# Altium PCB pcb.pcbdoc (part 5 of 6)
Units mm, origin at the board's own origin, x right, y up, seen from the top; angles counter-clockwise.
Board outline 95 x 60 mm, 4 copper layers (Top Layer, TopInt Layer, BotInt Layer, Bottom Layer), stack 1.459 mm thick; 162 components, 164 nets, 673 pads, 269 vias.
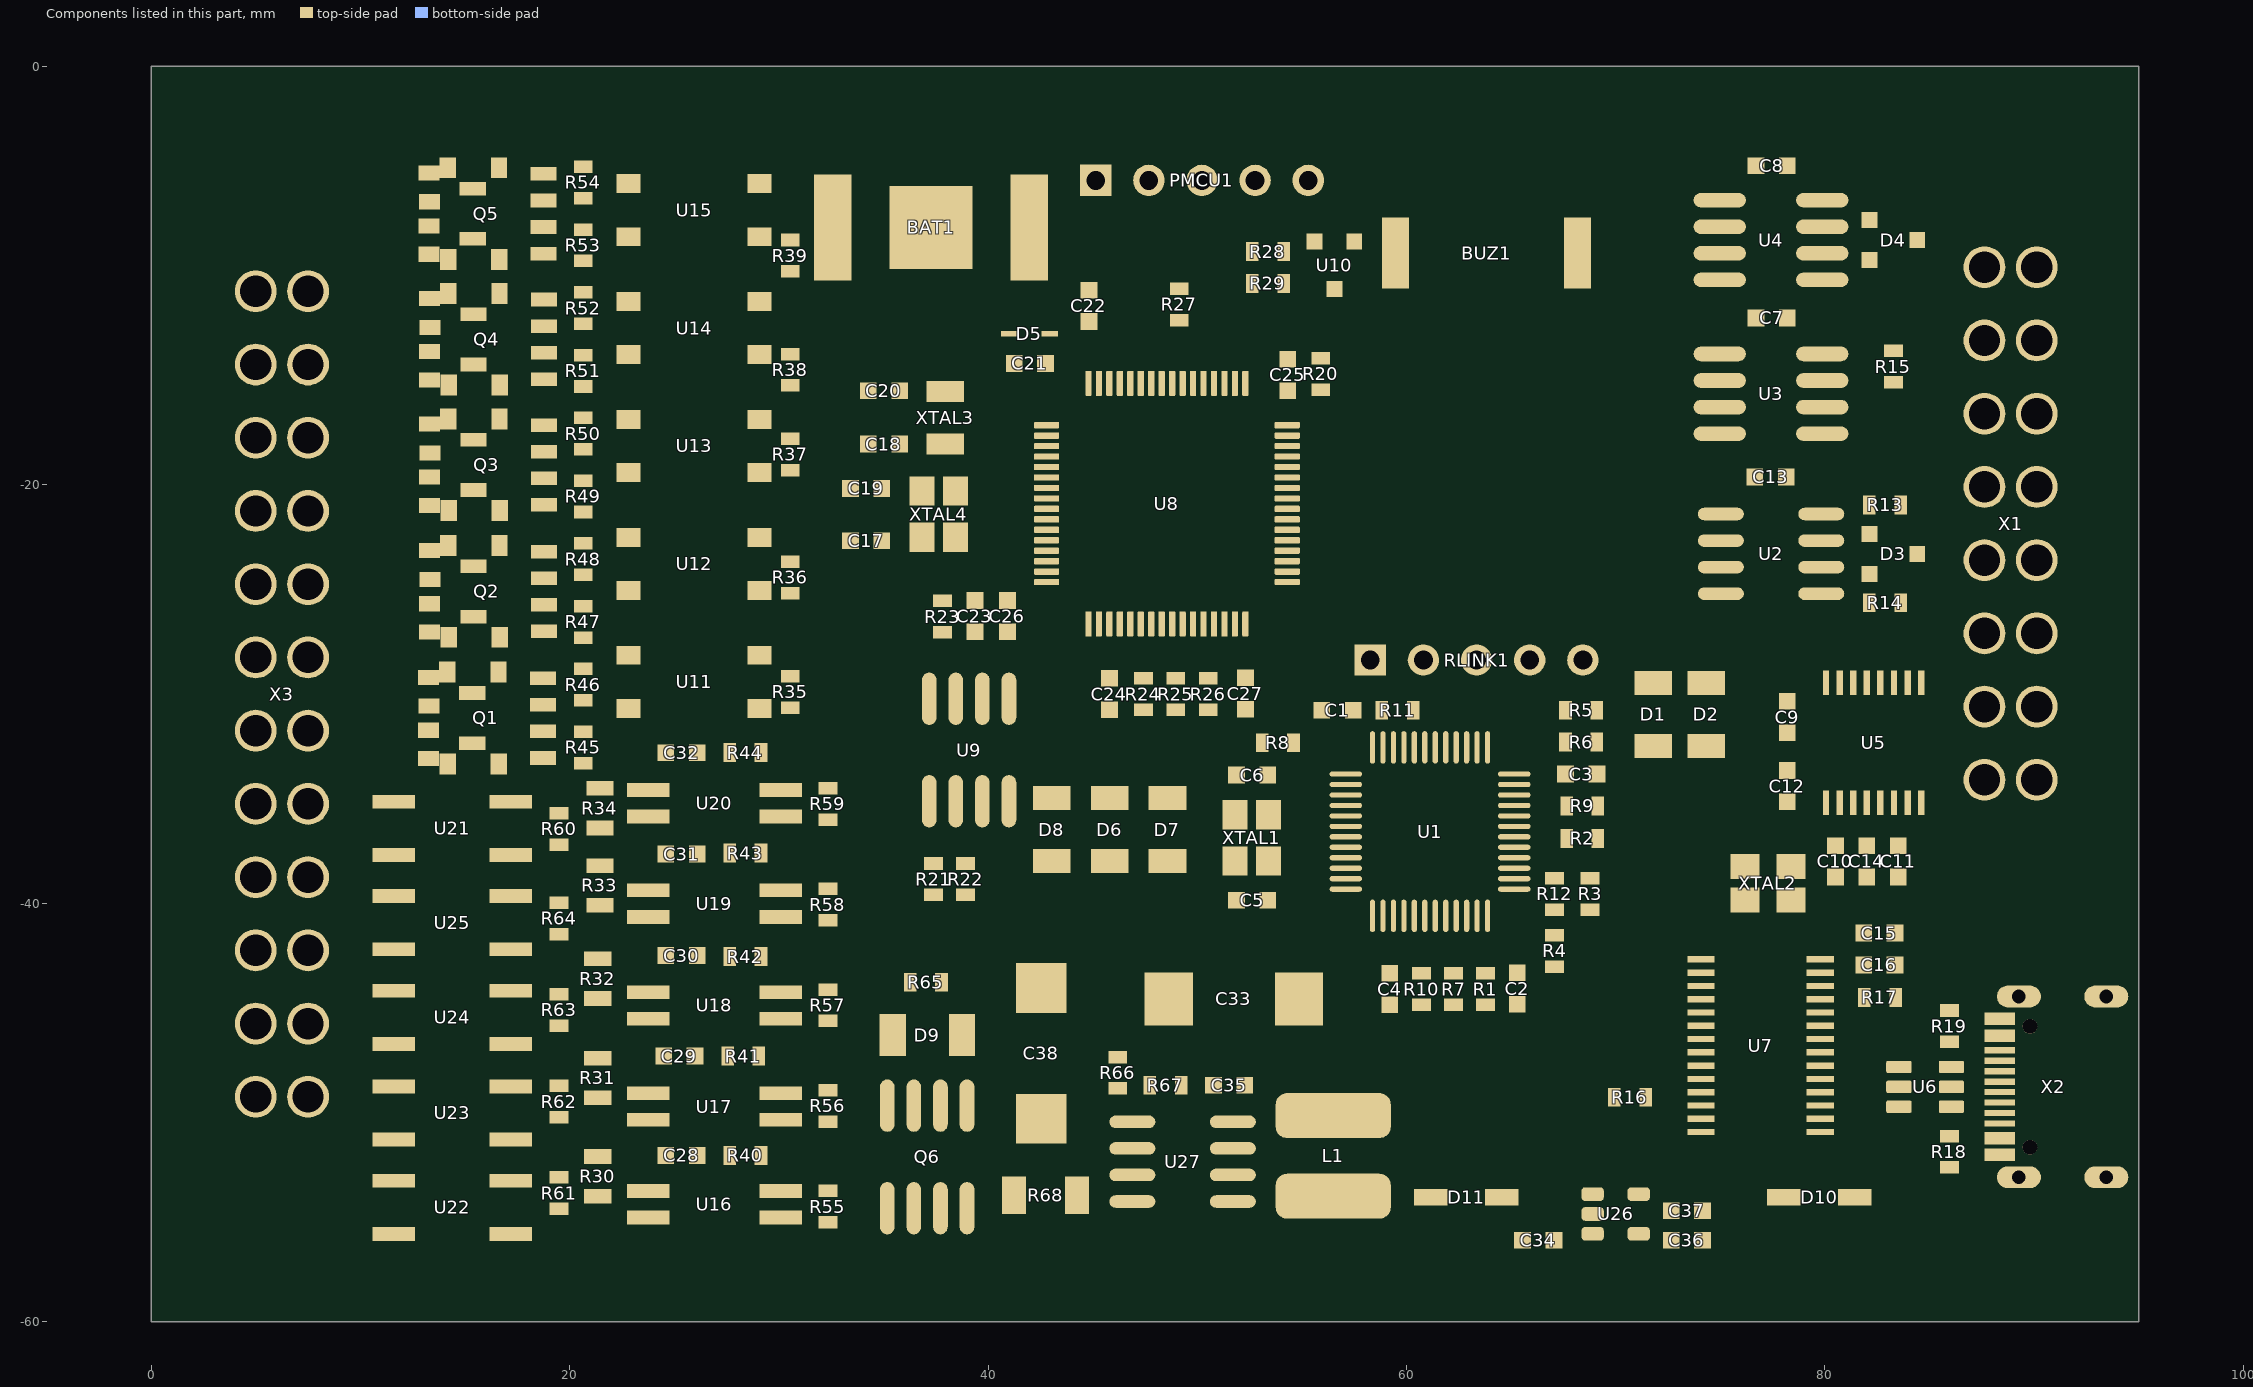
[diagram p7: the components of this part, seen from the top]

## Via types
v1: diameter 0.7, hole 0.3, Top Layer to Bottom Layer, tented both sides, 249 vias
v2: diameter 1, hole 0.5, Top Layer to Bottom Layer, tented both sides, 20 vias

## Nets (pads, with @x,y where several pads share a name; then routed paths per layer and width w, separated by ;. In a path a pad name is that pad's centre, name@x,y a point inside that pad or via, vN(x,y) a via of type N, cw(c..) or ccw(c..) an arc to the next point about the centre after c; other vN are vias at no path point) (continued)
copper on no net: (continued)
  Bottom Layer w0.025: 58.91,-6.877 59.976,-6.877 ; 58.91,-6.851 59.976,-6.851 ; 58.91,-6.826 59.976,-6.826 ; 58.91,-6.8 59.976,-6.8 ; 58.91,-6.775 59.976,-6.775 ; 58.91,-6.75 59.976,-6.75 ; 58.91,-6.724 59.062,-6.724 ; 58.91,-6.699 59.087,-6.699 ; 58.91,-6.673 59.087,-6.673 ; 58.91,-6.648 59.087,-6.648 ; 58.91,-6.623 59.087,-6.623 ; 58.935,-7.308 59.138,-7.308 ; 58.935,-7.283 59.113,-7.283 ; 58.935,-6.597 59.087,-6.597 ; 58.935,-6.572 59.113,-6.572 ; 58.935,-6.546 59.113,-6.546 ; 58.935,-6.521 59.113,-6.521 ; 58.96,-7.334 59.189,-7.334 ; 58.96,-7.258 59.087,-7.258 ; 58.96,-6.496 59.138,-6.496 ; 58.96,-6.47 59.164,-6.47 ; 58.96,-6.445 59.164,-6.445 ; 58.986,-7.359 59.24,-7.359 ; 58.986,-7.232 59.062,-7.232 ; 58.986,-6.419 59.189,-6.419 ; 59.011,-7.385 59.367,-7.385 ; 59.011,-6.394 59.214,-6.394 ; 59.011,-6.369 59.265,-6.369 ; 59.037,-7.41 59.773,-7.41 ; 59.037,-6.343 59.316,-6.343 ; 59.062,-7.435 59.722,-7.435 ; 59.062,-6.318 59.773,-6.318 ; 59.087,-7.461 59.697,-7.461 ; 59.087,-6.292 59.748,-6.292 ; 59.113,-6.267 59.722,-6.267 ; 59.138,-7.486 59.646,-7.486 ; 59.164,-6.242 59.672,-6.242 ; 59.189,-9.29 59.367,-9.29 ; 59.189,-9.264 59.367,-9.264 ; 59.189,-9.239 59.367,-9.239 ; 59.189,-9.213 59.367,-9.213 ; 59.189,-9.188 59.367,-9.188 ; 59.189,-9.163 59.367,-9.163 ; 59.189,-9.137 59.367,-9.137 ; 59.189,-9.112 59.392,-9.112 ; 59.189,-8.629 59.367,-8.629 ; 59.189,-8.604 59.367,-8.604 ; 59.189,-8.578 59.367,-8.578 ; 59.189,-8.553 59.367,-8.553 ; 59.214,-9.366 59.443,-9.366 ; 59.214,-9.34 59.418,-9.34 ; 59.214,-9.315 59.392,-9.315 ; 59.214,-9.086 59.418,-9.086 ; 59.214,-9.061 59.443,-9.061 ; 59.214,-8.528 59.392,-8.528 ; 59.214,-8.502 59.392,-8.502 ; 59.214,-8.477 59.418,-8.477 ; 59.214,-7.512 59.57,-7.512 ; 59.214,-6.216 59.621,-6.216 ; 59.24,-9.391 59.494,-9.391 ; 59.24,-9.036 59.468,-9.036 ; 59.24,-9.01 59.519,-9.01 ; 59.24,-8.451 59.443,-8.451 ; 59.24,-8.426 59.494,-8.426 ; 59.265,-9.417 59.57,-9.417 ; 59.265,-8.985 59.595,-8.985 ; 59.265,-8.401 59.519,-8.401 ; 59.291,-9.442 60.078,-9.442 ; 59.291,-8.959 59.697,-8.959 ; 59.291,-8.375 59.621,-8.375 ; 59.291,-8.35 60.053,-8.35 ; 59.291,-6.191 59.545,-6.191 ; 59.316,-9.467 60.053,-9.467 ; 59.316,-8.934 59.799,-8.934 ; 59.341,-9.493 60.002,-9.493 ; 59.341,-8.324 60.027,-8.324 ; 59.367,-8.909 59.875,-8.909 ; 59.367,-8.299 59.976,-8.299 ; 59.392,-9.518 59.976,-9.518 ; 59.418,-8.883 59.951,-8.883 ; 59.418,-8.274 59.951,-8.274 ; 59.418,-7.385 59.799,-7.385 ; 59.443,-9.544 59.9,-9.544 ; 59.494,-8.858 60.002,-8.858 ; 59.494,-8.248 59.875,-8.248 ; 59.519,-6.343 59.799,-6.343 ; 59.545,-7.359 59.824,-7.359 ; 59.57,-9.569 59.799,-9.569 ; 59.57,-8.832 60.027,-8.832 ; 59.595,-7.334 59.849,-7.334 ; 59.595,-6.369 59.824,-6.369 ; 59.621,-7.308 59.849,-7.308 ; 59.621,-6.394 59.849,-6.394 ; 59.646,-7.283 59.875,-7.283 ; 59.646,-6.419 59.875,-6.419 ; 59.672,-8.807 60.053,-8.807 ; 59.672,-7.258 59.9,-7.258 ; 59.672,-6.445 59.875,-6.445 ; 59.697,-7.232 59.9,-7.232 ; 59.697,-6.47 59.9,-6.47 ; 59.722,-7.207 59.926,-7.207 ; 59.722,-6.496 59.9,-6.496 ; 59.748,-8.375 60.078,-8.375 ; 59.748,-7.181 59.926,-7.181 ; 59.748,-7.156 59.951,-7.156 ; 59.748,-6.546 59.926,-6.546 ; 59.748,-6.521 59.926,-6.521 ; 59.773,-8.782 60.078,-8.782 ; 59.773,-7.131 59.951,-7.131 ; 59.773,-7.105 59.951,-7.105 ; 59.773,-6.623 59.951,-6.623 ; 59.773,-6.597 59.951,-6.597 ; 59.773,-6.572 59.951,-6.572 ; 59.799,-9.417 60.103,-9.417 ; 59.799,-7.08 59.976,-7.08 ; 59.799,-7.054 59.976,-7.054 ; 59.799,-7.029 59.976,-7.029 ; 59.799,-7.004 59.976,-7.004 ; 59.799,-6.724 59.976,-6.724 ; 59.799,-6.699 59.976,-6.699 ; 59.799,-6.673 59.976,-6.673 ; 59.799,-6.648 59.976,-6.648 ; 59.824,-8.756 60.103,-8.756 ; 59.824,-6.978 59.976,-6.978 ; 59.824,-6.953 59.976,-6.953 ; 59.824,-6.927 59.976,-6.927 ; 59.824,-6.902 59.976,-6.902 ; 59.849,-8.401 60.103,-8.401 ; 59.875,-9.391 60.129,-9.391 ; 59.875,-8.731 60.129,-8.731 ; 59.875,-8.426 60.103,-8.426 ; 59.9,-9.366 60.129,-9.366 ; 59.926,-8.705 60.129,-8.705 ; 59.926,-8.451 60.129,-8.451 ; 59.951,-9.34 60.154,-9.34 ; 59.951,-8.68 60.129,-8.68 ; 59.951,-8.655 60.129,-8.655 ; 59.951,-8.502 60.129,-8.502 ; 59.951,-8.477 60.129,-8.477 ; 59.976,-9.315 60.154,-9.315 ; 59.976,-9.29 60.18,-9.29 ; 59.976,-8.629 60.154,-8.629 ; 59.976,-8.604 60.154,-8.604 ; 59.976,-8.578 60.154,-8.578 ; 59.976,-8.553 60.154,-8.553 ; 59.976,-8.528 60.154,-8.528 ; 60.002,-9.264 60.18,-9.264 ; 60.002,-9.239 60.18,-9.239 ; 60.002,-9.213 60.18,-9.213 ; 60.027,-9.188 60.18,-9.188 ; 60.078,-6.343 60.154,-6.343 ; 60.078,-6.318 60.51,-6.318 ; 60.078,-6.292 60.484,-6.292 ; 60.078,-6.267 60.459,-6.267 ; 60.078,-6.242 60.408,-6.242 ; 60.078,-6.216 60.383,-6.216 ; 60.078,-6.191 60.307,-6.191 ; 60.23,-6.343 60.51,-6.343 ; 60.23,-4.972 60.408,-4.972 ; 60.23,-4.946 60.408,-4.946 ; 60.23,-4.921 60.408,-4.921 ; 60.23,-4.895 60.408,-4.895 ; 60.23,-4.87 60.408,-4.87 ; 60.23,-4.845 60.434,-4.845 ; 60.256,-5.048 60.459,-5.048 ; 60.256,-5.022 60.434,-5.022 ; 60.256,-4.997 60.434,-4.997 ; 60.256,-4.819 60.434,-4.819 ; 60.256,-4.794 60.459,-4.794 ; 60.256,-4.768 60.484,-4.768 ; 60.256,-4.311 60.408,-4.311 ; 60.256,-4.286 60.408,-4.286 ; 60.256,-4.26 60.434,-4.26 ; 60.256,-4.235 60.434,-4.235 ; 60.256,-4.21 60.459,-4.21 ; 60.256,-4.184 60.459,-4.184 ; 60.281,-5.099 60.535,-5.099 ; 60.281,-5.073 60.51,-5.073 ; 60.281,-4.743 60.51,-4.743 ; 60.281,-4.718 60.561,-4.718 ; 60.281,-4.159 60.484,-4.159 ; 60.281,-4.133 60.535,-4.133 ; 60.307,-5.124 60.611,-5.124 ; 60.307,-4.692 60.637,-4.692 ; 60.307,-4.108 60.586,-4.108 ; 60.332,-6.369 60.688,-6.369 ; 60.332,-5.149 61.119,-5.149 ; 60.332,-4.667 60.713,-4.667 ; 60.332,-4.083 60.662,-4.083 ; 60.357,-5.175 61.094,-5.175 ; 60.357,-4.057 61.094,-4.057 ; 60.383,-6.394 60.688,-6.394 ; 60.383,-5.2 61.069,-5.2 ; 60.383,-4.641 60.84,-4.641 ; 60.383,-4.032 61.069,-4.032 ; 60.408,-6.419 60.688,-6.419 ; 60.408,-4.616 60.916,-4.616 ; 60.408,-4.006 61.043,-4.006 ; 60.434,-6.445 60.688,-6.445 ; 60.434,-5.226 61.018,-5.226 ; 60.459,-9.544 60.637,-9.544 ; 60.459,-9.518 60.637,-9.518 ; 60.459,-9.493 60.637,-9.493 ; 60.459,-9.467 60.637,-9.467 ; 60.459,-9.442 60.637,-9.442 ; 60.459,-9.417 60.637,-9.417 ; 60.459,-9.391 60.637,-9.391 ; 60.459,-9.366 60.637,-9.366 ; 60.459,-9.34 60.637,-9.34 ; 60.459,-9.315 60.637,-9.315 ; 60.459,-9.29 60.637,-9.29 ; 60.459,-9.264 60.637,-9.264 ; 60.459,-9.239 60.637,-9.239 ; 60.459,-9.213 60.637,-9.213 ; 60.459,-9.188 60.637,-9.188 ; 60.459,-9.163 60.637,-9.163 ; 60.459,-9.137 60.637,-9.137 ; 60.459,-9.112 60.637,-9.112 ; 60.459,-9.086 60.637,-9.086 ; 60.459,-9.061 60.637,-9.061 ; 60.459,-9.036 60.637,-9.036 ; 60.459,-9.01 60.637,-9.01 ; 60.459,-8.985 60.637,-8.985 ; 60.459,-8.959 60.637,-8.959 ; 60.459,-8.934 60.637,-8.934 ; 60.459,-8.909 60.637,-8.909 ; 60.459,-8.883 60.637,-8.883 ; 60.459,-8.858 60.637,-8.858 ; 60.459,-8.832 60.637,-8.832 ; 60.459,-8.807 60.637,-8.807 ; 60.459,-8.782 60.637,-8.782 ; 60.459,-8.756 60.637,-8.756 ; 60.459,-8.731 60.637,-8.731 ; 60.459,-8.705 60.637,-8.705 ; 60.459,-8.68 60.637,-8.68 ; 60.459,-8.655 60.637,-8.655 ; 60.459,-8.629 60.637,-8.629 ; 60.459,-8.604 60.637,-8.604 ; 60.459,-8.578 60.637,-8.578 ; 60.459,-6.47 60.688,-6.47 ; 60.459,-4.591 60.992,-4.591 ; 60.459,-3.981 60.992,-3.981 ; 60.484,-8.553 60.662,-8.553 ; 60.484,-8.528 60.662,-8.528 ; 60.484,-8.502 60.662,-8.502 ; 60.484,-8.477 60.688,-8.477 ; 60.484,-6.521 60.688,-6.521 ; 60.484,-6.496 60.688,-6.496 ; 60.51,-8.451 60.713,-8.451 ; 60.51,-8.426 60.738,-8.426 ; 60.51,-8.401 60.764,-8.401 ; 60.51,-6.597 60.688,-6.597 ; 60.51,-6.572 60.688,-6.572 ; 60.51,-6.546 60.688,-6.546 ; 60.51,-5.251 60.942,-5.251 ; 60.535,-8.375 60.865,-8.375 ; 60.535,-7.486 60.688,-7.486 ; 60.535,-7.461 60.688,-7.461 ; 60.535,-7.435 60.688,-7.435 ; 60.535,-7.41 60.688,-7.41 ; 60.535,-7.385 60.688,-7.385 ; 60.535,-7.359 60.688,-7.359 ; 60.535,-7.334 60.688,-7.334 ; 60.535,-7.308 60.688,-7.308 ; 60.535,-7.283 60.688,-7.283 ; 60.535,-7.258 60.688,-7.258 ; 60.535,-7.232 60.688,-7.232 ; 60.535,-7.207 60.688,-7.207 ; 60.535,-7.181 60.688,-7.181 ; 60.535,-7.156 60.688,-7.156 ; 60.535,-7.131 60.688,-7.131 ; 60.535,-7.105 60.688,-7.105 ; 60.535,-7.08 60.688,-7.08 ; 60.535,-7.054 60.688,-7.054 ; 60.535,-7.029 60.688,-7.029 ; 60.535,-7.004 60.688,-7.004 ; 60.535,-6.978 60.688,-6.978 ; 60.535,-6.953 60.688,-6.953 ; 60.535,-6.927 60.688,-6.927 ; 60.535,-6.902 60.688,-6.902 ; 60.535,-6.877 60.688,-6.877 ; 60.535,-6.851 60.688,-6.851 ; 60.535,-6.826 60.688,-6.826 ; 60.535,-6.8 60.688,-6.8 ; 60.535,-6.775 60.688,-6.775 ; 60.535,-6.75 60.688,-6.75 ; 60.535,-6.724 60.688,-6.724 ; 60.535,-6.699 60.688,-6.699 ; 60.535,-6.673 60.688,-6.673 ; 60.535,-6.648 60.688,-6.648 ; 60.535,-6.623 60.688,-6.623 ; 60.535,-6.343 60.688,-6.343 ; 60.535,-6.318 60.688,-6.318 ; 60.535,-6.292 60.688,-6.292 ; 60.535,-6.267 60.688,-6.267 ; 60.535,-6.242 60.688,-6.242 ; 60.535,-6.216 60.688,-6.216 ; 60.535,-4.565 61.043,-4.565 ; 60.535,-3.956 60.942,-3.956 ; 60.561,-8.35 61.221,-8.35 ; 60.586,-8.324 61.196,-8.324 ; 60.611,-8.299 61.145,-8.299 ; 60.611,-4.54 61.069,-4.54 ; 60.637,-8.274 61.119,-8.274 ; 60.637,-5.276 60.815,-5.276 ; 60.662,-3.93 60.789,-3.93 ; 60.713,-8.248 61.043,-8.248 ; 60.713,-4.514 61.094,-4.514 ; 60.815,-5.124 61.145,-5.124 ; 60.815,-4.489 61.119,-4.489 ; 60.815,-4.083 61.119,-4.083 ; 60.865,-4.464 61.145,-4.464 ; 60.891,-4.108 61.145,-4.108 ; 60.916,-5.099 61.17,-5.099 ; 60.942,-5.073 61.196,-5.073 ; 60.942,-4.438 61.17,-4.438 ; 60.942,-4.133 61.17,-4.133 ; 60.967,-8.375 61.246,-8.375 ; 60.967,-4.413 61.17,-4.413 ; 60.967,-4.159 61.17,-4.159 ; 60.992,-5.048 61.196,-5.048 ; 60.992,-4.387 61.196,-4.387 ; 60.992,-4.184 61.17,-4.184 ; 61.018,-7.486 61.196,-7.486 ; 61.018,-7.461 61.196,-7.461 ; 61.018,-7.435 61.196,-7.435 ; 61.018,-7.41 61.196,-7.41 ; 61.018,-5.022 61.221,-5.022 ; 61.018,-4.997 61.221,-4.997 ; 61.018,-4.362 61.196,-4.362 ; 61.018,-4.337 61.196,-4.337 ; 61.018,-4.311 61.196,-4.311 ; 61.018,-4.286 61.196,-4.286 ; 61.018,-4.26 61.196,-4.26 ; 61.018,-4.235 61.196,-4.235 ; 61.018,-4.21 61.196,-4.21 ; 61.043,-8.401 61.272,-8.401 ; 61.043,-7.385 61.221,-7.385 ; 61.043,-7.359 61.475,-7.359 ; 61.043,-7.334 61.424,-7.334 ; 61.043,-7.308 61.373,-7.308 ; 61.043,-7.283 61.348,-7.283 ; 61.043,-7.258 61.297,-7.258 ; 61.043,-7.232 61.272,-7.232 ; 61.043,-7.207 61.272,-7.207 ; 61.043,-7.181 61.246,-7.181 ; 61.043,-7.156 61.221,-7.156 ; 61.043,-7.131 61.221,-7.131 ; 61.043,-7.105 61.221,-7.105 ; 61.043,-7.08 61.221,-7.08 ; 61.043,-7.054 61.221,-7.054 ; 61.043,-7.029 61.221,-7.029 ; 61.043,-7.004 61.221,-7.004 ; 61.043,-6.978 61.221,-6.978 ; 61.043,-6.953 61.221,-6.953 ; 61.043,-6.927 61.221,-6.927 ; 61.043,-6.902 61.221,-6.902 ; 61.043,-6.877 61.221,-6.877 ; 61.043,-6.851 61.907,-6.851 ; 61.043,-6.826 61.881,-6.826 ; 61.043,-6.8 61.831,-6.8 ; 61.043,-6.775 61.754,-6.775 ; 61.043,-6.75 61.627,-6.75 ; 61.043,-6.724 61.221,-6.724 ; 61.043,-6.699 61.221,-6.699 ; 61.043,-6.673 61.221,-6.673 ; 61.043,-6.648 61.221,-6.648 ; 61.043,-6.623 61.221,-6.623 ; 61.043,-6.597 61.221,-6.597 ; 61.043,-6.572 61.221,-6.572 ; 61.043,-6.546 61.221,-6.546 ; 61.043,-6.521 61.221,-6.521 ; 61.043,-4.972 61.221,-4.972 ; 61.043,-4.946 61.221,-4.946 ; 61.069,-6.496 61.246,-6.496 ; 61.069,-6.47 61.246,-6.47 ; 61.069,-6.445 61.272,-6.445 ; 61.069,-4.921 61.246,-4.921 ; 61.069,-4.895 61.246,-4.895 ; 61.094,-8.426 61.45,-8.426 ; 61.094,-6.419 61.272,-6.419 ; 61.094,-6.394 61.323,-6.394 ; 61.119,-6.369 61.348,-6.369 ; 61.119,-6.343 61.399,-6.343 ; 61.145,-8.451 61.45,-8.451 ; 61.145,-6.318 61.907,-6.318 ; 61.17,-8.477 61.45,-8.477 ; 61.17,-6.292 61.881,-6.292 ; 61.196,-8.528 61.45,-8.528 ; 61.196,-8.502 61.45,-8.502 ; 61.196,-6.267 61.856,-6.267 ; 61.221,-8.553 61.45,-8.553 ; 61.246,-8.604 61.45,-8.604 ; 61.246,-8.578 61.45,-8.578 ; 61.246,-7.385 61.983,-7.385 ; 61.246,-6.242 61.805,-6.242 ; 61.272,-8.655 61.45,-8.655 ; 61.272,-8.629 61.45,-8.629 ; 61.272,-7.41 61.958,-7.41 ; 61.297,-9.544 61.45,-9.544 ; 61.297,-9.518 61.45,-9.518 ; 61.297,-9.493 61.45,-9.493 ; 61.297,-9.467 61.45,-9.467 ; 61.297,-9.442 61.45,-9.442 ; 61.297,-9.417 61.45,-9.417 ; 61.297,-9.391 61.45,-9.391 ; 61.297,-9.366 61.45,-9.366 ; 61.297,-9.34 61.45,-9.34 ; 61.297,-9.315 61.45,-9.315 ; 61.297,-9.29 61.45,-9.29 ; 61.297,-9.264 61.45,-9.264 ; 61.297,-9.239 61.45,-9.239 ; 61.297,-9.213 61.45,-9.213 ; 61.297,-9.188 61.45,-9.188 ; 61.297,-9.163 61.45,-9.163 ; 61.297,-9.137 61.45,-9.137 ; 61.297,-9.112 61.45,-9.112 ; 61.297,-9.086 61.45,-9.086 ; 61.297,-9.061 61.45,-9.061 ; 61.297,-9.036 61.45,-9.036 ; 61.297,-9.01 61.45,-9.01 ; 61.297,-8.985 61.45,-8.985 ; 61.297,-8.959 61.45,-8.959 ; 61.297,-8.934 61.45,-8.934 ; 61.297,-8.909 61.45,-8.909 ; 61.297,-8.883 61.45,-8.883 ; 61.297,-8.858 61.45,-8.858 ; 61.297,-8.832 61.45,-8.832 ; 61.297,-8.807 61.45,-8.807 ; 61.297,-8.782 61.45,-8.782 ; 61.297,-8.756 61.45,-8.756 ; 61.297,-8.731 61.45,-8.731 ; 61.297,-8.705 61.45,-8.705 ; 61.297,-8.68 61.45,-8.68 ; 61.297,-8.401 61.45,-8.401 ; 61.297,-8.375 61.45,-8.375 ; 61.297,-8.35 61.45,-8.35 ; 61.297,-8.324 61.45,-8.324 ; 61.297,-8.299 61.45,-8.299 ; 61.297,-8.274 61.45,-8.274 ; 61.297,-8.248 61.45,-8.248 ; 61.297,-7.435 61.932,-7.435 ; 61.297,-6.216 61.754,-6.216 ; 61.348,-7.461 61.907,-7.461 ; 61.399,-7.486 61.856,-7.486 ; 61.399,-6.191 61.653,-6.191 ; 61.424,-4.921 61.602,-4.921 ; 61.424,-4.895 61.602,-4.895 ; 61.424,-4.87 61.602,-4.87 ; 61.424,-4.845 61.602,-4.845 ; 61.424,-4.387 61.602,-4.387 ; 61.424,-4.362 61.602,-4.362 ; 61.424,-4.337 61.602,-4.337 ; 61.424,-4.311 61.602,-4.311 ; 61.45,-4.997 61.653,-4.997 ; 61.45,-4.972 61.627,-4.972 ; 61.45,-4.946 61.627,-4.946 ; 61.45,-4.286 61.627,-4.286 ; 61.45,-4.26 61.627,-4.26 ; 61.45,-4.235 61.653,-4.235 ; 61.475,-7.512 61.805,-7.512 ; 61.475,-5.048 61.704,-5.048 ; 61.475,-5.022 61.678,-5.022 ; 61.475,-4.21 61.653,-4.21 ; 61.475,-4.184 61.678,-4.184 ; 61.5,-5.073 61.729,-5.073 ; 61.5,-4.159 61.704,-4.159 ; 61.5,-4.133 61.729,-4.133 ; 61.526,-6.877 61.932,-6.877 ; 61.526,-5.099 61.78,-5.099 ; 61.526,-4.108 61.78,-4.108 ; 61.551,-5.124 61.831,-5.124 ; 61.551,-4.083 61.856,-4.083 ; 61.577,-5.149 62.313,-5.149 ; 61.577,-4.057 62.288,-4.057 ; 61.602,-5.175 62.262,-5.175 ; 61.602,-4.032 62.262,-4.032 ; 61.627,-5.2 62.237,-5.2 ; 61.627,-4.006 62.237,-4.006 ; 61.653,-6.902 61.958,-6.902 ; 61.653,-6.343 61.932,-6.343 ; 61.678,-5.226 62.186,-5.226 ; 61.678,-3.981 62.186,-3.981 ; 61.729,-9.112 61.907,-9.112 ; 61.729,-9.086 61.907,-9.086 ; 61.729,-9.061 61.907,-9.061 ; 61.729,-9.036 61.907,-9.036 ; 61.729,-9.01 61.881,-9.01 ; 61.729,-8.985 61.881,-8.985 ; 61.729,-8.959 61.881,-8.959 ; 61.729,-8.934 61.881,-8.934 ; 61.729,-8.909 61.881,-8.909 ; 61.729,-8.883 61.881,-8.883 ; 61.729,-8.858 61.881,-8.858 ; 61.729,-8.832 61.881,-8.832 ; 61.729,-8.807 61.881,-8.807 ; 61.729,-8.782 61.881,-8.782 ; 61.729,-8.756 61.907,-8.756 ; 61.729,-8.731 61.907,-8.731 ; 61.729,-8.705 61.907,-8.705 ; 61.729,-8.68 61.907,-8.68 ; 61.729,-7.359 62.008,-7.359 ; 61.729,-6.927 61.983,-6.927 ; 61.729,-6.369 61.958,-6.369 ; 61.729,-3.956 62.135,-3.956 ; 61.754,-9.188 61.932,-9.188 ; 61.754,-9.163 61.932,-9.163 ; 61.754,-9.137 61.932,-9.137 ; 61.754,-8.655 61.932,-8.655 ; 61.754,-8.629 61.932,-8.629 ; 61.754,-8.604 61.958,-8.604 ; 61.754,-6.394 61.983,-6.394 ; 61.754,-5.251 62.135,-5.251 ; 61.78,-9.264 61.983,-9.264 ; 61.78,-9.239 61.983,-9.239 ; 61.78,-9.213 61.958,-9.213 ; 61.78,-8.578 61.958,-8.578 ; 61.78,-8.553 61.983,-8.553 ; 61.78,-7.334 62.034,-7.334 ; 61.78,-6.953 62.008,-6.953 ; 61.78,-6.419 62.008,-6.419 ; 61.805,-9.315 62.034,-9.315 ; 61.805,-9.29 62.008,-9.29 ; 61.805,-8.528 62.008,-8.528 ; 61.805,-8.502 62.008,-8.502 ; 61.805,-7.308 62.034,-7.308 ; 61.805,-6.978 62.034,-6.978 ; 61.805,-6.445 62.008,-6.445 ; 61.831,-9.34 62.059,-9.34 ; 61.831,-8.477 62.034,-8.477 ; 61.831,-8.451 62.059,-8.451 ; 61.831,-7.283 62.034,-7.283 ; 61.831,-7.004 62.034,-7.004 ; 61.831,-6.47 62.008,-6.47 ; 61.856,-9.366 62.085,-9.366 ; 61.856,-8.426 62.11,-8.426 ; 61.856,-7.258 62.059,-7.258 ; 61.856,-7.029 62.034,-7.029 ; 61.856,-6.572 62.034,-6.572 ; 61.856,-6.546 62.034,-6.546 ; 61.856,-6.521 62.034,-6.521 ; 61.856,-6.496 62.034,-6.496 ; 61.856,-5.276 62.008,-5.276 ; 61.881,-9.391 62.135,-9.391 ; 61.881,-8.401 62.161,-8.401 ; 61.881,-7.232 62.059,-7.232 ; 61.881,-7.207 62.059,-7.207 ; 61.881,-7.181 62.059,-7.181 ; 61.881,-7.156 62.059,-7.156 ; 61.881,-7.131 62.059,-7.131 ; 61.881,-7.105 62.059,-7.105 ; 61.881,-7.08 62.059,-7.08 ; 61.881,-7.054 62.059,-7.054 ; 61.881,-3.93 61.983,-3.93 ; 61.907,-9.417 62.212,-9.417 ; 61.907,-8.375 62.237,-8.375 ; 61.932,-9.442 62.669,-9.442 ; 61.932,-8.35 62.669,-8.35 ; 61.958,-9.467 62.643,-9.467 ; 61.958,-8.324 62.643,-8.324 ; 61.983,-9.493 62.618,-9.493 ; 62.008,-8.299 62.593,-8.299 ; 62.008,-4.083 62.313,-4.083 ; 62.034,-9.518 62.567,-9.518 ; 62.034,-5.124 62.339,-5.124 ; 62.059,-8.274 62.542,-8.274 ; 62.085,-9.544 62.516,-9.544 ; 62.085,-5.099 62.339,-5.099 ; 62.085,-4.108 62.339,-4.108 ; 62.11,-8.248 62.491,-8.248 ; 62.135,-5.073 62.364,-5.073 ; 62.135,-4.133 62.364,-4.133 ; 62.161,-5.048 62.389,-5.048 ; 62.161,-4.159 62.389,-4.159 ; 62.186,-5.022 62.389,-5.022 ; 62.186,-4.184 62.389,-4.184 ; 62.212,-9.569 62.415,-9.569 ; 62.212,-4.997 62.415,-4.997 ; 62.212,-4.21 62.415,-4.21 ; 62.237,-6.267 62.415,-6.267 ; 62.237,-6.242 62.415,-6.242 ; 62.237,-6.216 62.415,-6.216 ; 62.237,-4.972 62.415,-4.972 ; 62.237,-4.26 62.44,-4.26 ; 62.237,-4.235 62.415,-4.235 ; 62.262,-6.343 62.44,-6.343 ; 62.262,-6.318 62.44,-6.318 ; 62.262,-6.292 62.44,-6.292 ; 62.262,-4.946 62.44,-4.946 ; 62.262,-4.921 62.44,-4.921 ; 62.262,-4.311 62.466,-4.311 ; 62.262,-4.286 62.44,-4.286 ; 62.288,-6.445 62.466,-6.445 ; 62.288,-6.419 62.466,-6.419 ; 62.288,-6.394 62.466,-6.394 ; 62.288,-6.369 62.466,-6.369 ; 62.288,-4.895 62.466,-4.895 ; 62.288,-4.87 62.466,-4.87 ; 62.288,-4.845 62.466,-4.845 ; 62.288,-4.387 62.466,-4.387 ; 62.288,-4.362 62.466,-4.362 ; 62.288,-4.337 62.466,-4.337 ; 62.313,-6.521 62.491,-6.521 ; 62.313,-6.496 62.491,-6.496 ; 62.313,-6.47 62.491,-6.47 ; 62.313,-4.819 62.466,-4.819 ; 62.313,-4.794 62.491,-4.794 ; 62.313,-4.768 62.491,-4.768 ; 62.313,-4.743 62.491,-4.743 ; 62.313,-4.718 62.491,-4.718 ; 62.313,-4.692 62.491,-4.692 ; 62.313,-4.667 62.491,-4.667 ; 62.313,-4.641 62.491,-4.641 ; 62.313,-4.616 62.491,-4.616 ; 62.313,-4.591 62.491,-4.591 ; 62.313,-4.565 62.491,-4.565 ; 62.313,-4.54 62.491,-4.54 ; 62.313,-4.514 62.491,-4.514 ; 62.313,-4.489 62.491,-4.489 ; 62.313,-4.464 62.491,-4.464 ; 62.313,-4.438 62.491,-4.438 ; 62.313,-4.413 62.491,-4.413 ; 62.339,-6.597 62.516,-6.597 ; 62.339,-6.572 62.516,-6.572 ; 62.339,-6.546 62.491,-6.546 ; 62.364,-8.375 62.694,-8.375 ; 62.364,-6.699 62.542,-6.699 ; 62.364,-6.673 62.542,-6.673 ; 62.364,-6.648 62.516,-6.648 ; 62.364,-6.623 62.516,-6.623 ; 62.389,-9.417 62.72,-9.417 ; 62.389,-6.775 62.567,-6.775 ; 62.389,-6.75 62.567,-6.75 ; 62.389,-6.724 62.542,-6.724 ; 62.415,-6.877 62.593,-6.877 ; 62.415,-6.851 62.593,-6.851 ; 62.415,-6.826 62.567,-6.826 ; 62.415,-6.8 62.567,-6.8 ; 62.44,-8.401 62.72,-8.401 ; 62.44,-6.953 62.618,-6.953 ; 62.44,-6.927 62.593,-6.927 ; 62.44,-6.902 62.593,-6.902 ; 62.466,-9.391 62.72,-9.391 ; 62.466,-7.054 62.643,-7.054 ; 62.466,-7.029 62.618,-7.029 ; 62.466,-7.004 62.618,-7.004 ; 62.466,-6.978 62.618,-6.978 ; 62.491,-8.426 62.745,-8.426 ; 62.491,-7.131 62.669,-7.131 ; 62.491,-7.105 62.643,-7.105 ; 62.491,-7.08 62.643,-7.08 ; 62.516,-9.366 62.745,-9.366 ; 62.516,-7.207 62.669,-7.207 ; 62.516,-7.181 62.669,-7.181 ; 62.516,-7.156 62.669,-7.156 ; 62.542,-9.34 62.77,-9.34 ; 62.542,-8.451 62.77,-8.451 ; 62.542,-7.308 62.821,-7.308 ; 62.542,-7.283 62.821,-7.283 ; 62.542,-7.258 62.847,-7.258 ; 62.542,-7.232 62.847,-7.232 ; 62.567,-9.315 62.796,-9.315 ; 62.567,-8.477 62.77,-8.477 ; 62.567,-7.385 62.796,-7.385 ; 62.567,-7.359 62.796,-7.359 ; 62.567,-7.334 62.821,-7.334 ; 62.593,-9.29 62.796,-9.29 ; 62.593,-8.502 62.796,-8.502 ; 62.593,-7.486 62.77,-7.486 ; 62.593,-7.461 62.77,-7.461 ; 62.593,-7.435 62.77,-7.435 ; 62.593,-7.41 62.796,-7.41 ; 62.618,-9.264 62.821,-9.264 ; 62.618,-8.553 62.821,-8.553 ; 62.618,-8.528 62.821,-8.528 ; 62.643,-9.239 62.821,-9.239 ; 62.643,-9.213 62.847,-9.213 ; 62.643,-8.604 62.847,-8.604 ; 62.643,-8.578 62.821,-8.578 ; 62.669,-9.188 62.847,-9.188 ; 62.669,-9.163 62.847,-9.163 ; 62.669,-9.137 62.872,-9.137 ; 62.669,-8.655 62.847,-8.655 ; 62.669,-8.629 62.847,-8.629 ; 62.694,-9.112 62.872,-9.112 ; 62.694,-9.086 62.872,-9.086 ; 62.694,-9.061 62.872,-9.061 ; 62.694,-8.756 62.872,-8.756 ; 62.694,-8.731 62.872,-8.731 ; 62.694,-8.705 62.872,-8.705 ; 62.694,-8.68 62.872,-8.68 ; 62.694,-7.207 62.847,-7.207 ; 62.694,-7.181 62.872,-7.181 ; 62.72,-9.036 62.872,-9.036 ; 62.72,-9.01 62.872,-9.01 ; 62.72,-8.985 62.872,-8.985 ; 62.72,-8.959 62.897,-8.959 ; 62.72,-8.934 62.897,-8.934 ; 62.72,-8.909 62.897,-8.909 ; 62.72,-8.883 62.897,-8.883 ; 62.72,-8.858 62.897,-8.858 ; 62.72,-8.832 62.897,-8.832 ; 62.72,-8.807 62.872,-8.807 ; 62.72,-8.782 62.872,-8.782 ; 62.72,-7.156 62.872,-7.156 ; 62.72,-7.131 62.872,-7.131 ; 62.72,-7.105 62.897,-7.105 ; 62.745,-7.08 62.897,-7.08 ; 62.745,-7.054 62.897,-7.054 ; 62.745,-7.029 62.923,-7.029 ; 62.745,-3.651 62.948,-3.651 ; 62.745,-3.625 62.974,-3.625 ; 62.745,-3.6 62.974,-3.6 ; 62.745,-3.575 62.974,-3.575 ; 62.745,-3.549 62.974,-3.549 ; 62.77,-7.004 62.923,-7.004 ; 62.77,-6.978 62.923,-6.978 ; 62.77,-6.953 62.948,-6.953 ; 62.77,-5.251 62.948,-5.251 ; 62.77,-5.226 62.948,-5.226 ; 62.77,-5.2 62.948,-5.2 ; 62.77,-5.175 62.948,-5.175 ; 62.77,-5.149 62.948,-5.149 ; 62.77,-5.124 62.948,-5.124 ; 62.77,-5.099 62.948,-5.099 ; 62.77,-5.073 62.948,-5.073 ; 62.77,-5.048 62.948,-5.048 ; 62.77,-5.022 62.948,-5.022 ; 62.77,-4.997 62.948,-4.997 ; 62.77,-4.972 62.948,-4.972 ; 62.77,-4.946 62.948,-4.946 ; 62.77,-4.921 62.948,-4.921 ; 62.77,-4.895 62.948,-4.895 ; 62.77,-4.87 62.948,-4.87 ; 62.77,-4.845 62.948,-4.845 ; 62.77,-4.819 62.948,-4.819 ; 62.77,-4.794 62.948,-4.794 ; 62.77,-4.768 62.948,-4.768 ; 62.77,-4.743 62.948,-4.743 ; 62.77,-4.718 62.948,-4.718 ; 62.77,-4.692 62.948,-4.692 ; 62.77,-4.667 62.948,-4.667 ; 62.77,-4.641 62.948,-4.641 ; 62.77,-4.616 62.948,-4.616 ; 62.77,-4.591 62.948,-4.591 ; 62.77,-4.565 62.948,-4.565 ; 62.77,-4.54 62.948,-4.54 ; 62.77,-4.514 62.948,-4.514 ; 62.77,-4.489 62.948,-4.489 ; 62.77,-4.464 62.948,-4.464 ; 62.77,-4.438 62.948,-4.438 ; 62.77,-4.413 62.948,-4.413 ; 62.77,-4.387 62.948,-4.387 ; 62.77,-4.362 62.948,-4.362 ; 62.77,-4.337 62.948,-4.337 ; 62.77,-4.311 62.948,-4.311 ; 62.77,-4.286 62.948,-4.286 ; 62.77,-4.26 62.948,-4.26 ; 62.77,-4.235 62.948,-4.235 ; 62.77,-4.21 62.948,-4.21 ; 62.77,-4.184 62.948,-4.184 ; 62.77,-4.159 62.948,-4.159 ; 62.77,-4.133 62.948,-4.133 ; 62.77,-4.108 62.948,-4.108 ; 62.77,-4.083 62.948,-4.083 ; 62.77,-4.057 62.948,-4.057 ; 62.77,-4.032 62.948,-4.032 ; 62.77,-4.006 62.948,-4.006 ; 62.77,-3.981 62.948,-3.981 ; 62.77,-3.956 62.948,-3.956 ; 62.77,-3.676 62.948,-3.676 ; 62.77,-3.524 62.948,-3.524 ; 62.796,-6.927 62.948,-6.927 ; 62.796,-6.902 62.948,-6.902 ; 62.796,-6.877 62.948,-6.877 ; 62.796,-6.851 62.974,-6.851 ; 62.796,-3.498 62.923,-3.498 ; 62.821,-6.826 62.974,-6.826 ; 62.821,-6.8 62.974,-6.8 ; 62.821,-6.775 62.999,-6.775 ; 62.821,-3.702 62.897,-3.702 ; 62.847,-6.75 62.999,-6.75 ; 62.847,-6.724 62.999,-6.724 ; 62.847,-6.699 63.024,-6.699 ; 62.872,-6.673 63.024,-6.673 ; 62.872,-6.648 63.024,-6.648 ; 62.872,-6.623 63.05,-6.623 ; 62.897,-6.597 63.05,-6.597 ; 62.897,-6.572 63.05,-6.572 ; 62.897,-6.546 63.075,-6.546 ; 62.923,-6.521 63.075,-6.521 ; 62.923,-6.496 63.075,-6.496 ; 62.923,-6.47 63.228,-6.47 ; 62.923,-6.445 63.228,-6.445 ; 62.948,-6.419 63.228,-6.419 ; 62.948,-6.394 63.228,-6.394 ; 62.948,-6.369 63.202,-6.369 ; 62.974,-6.343 63.202,-6.343 ; 62.974,-6.318 63.202,-6.318 ; 62.974,-6.292 63.177,-6.292 ; 62.999,-6.267 63.177,-6.267 ; 62.999,-6.242 63.177,-6.242 ; 62.999,-6.216 63.151,-6.216 ; 63.101,-6.546 63.253,-6.546 ; 63.101,-6.521 63.253,-6.521 ; 63.101,-6.496 63.253,-6.496 ; 63.126,-7.893 63.355,-7.893 ; 63.126,-7.867 63.355,-7.867 ; 63.126,-6.648 63.304,-6.648 ; 63.126,-6.623 63.278,-6.623 ; 63.126,-6.597 63.278,-6.597 ; 63.126,-6.572 63.278,-6.572 ; 63.151,-7.969 63.329,-7.969 ; 63.151,-7.943 63.355,-7.943 ; 63.151,-7.918 63.355,-7.918 ; 63.151,-7.842 63.355,-7.842 ; 63.151,-7.816 63.329,-7.816 ; 63.151,-6.724 63.329,-6.724 ; 63.151,-6.699 63.304,-6.699 ; 63.151,-6.673 63.304,-6.673 ; 63.177,-9.544 63.329,-9.544 ; 63.177,-9.518 63.329,-9.518 ; 63.177,-9.493 63.329,-9.493 ; 63.177,-9.467 63.329,-9.467 ; 63.177,-9.442 63.329,-9.442 ; 63.177,-9.417 63.329,-9.417 ; 63.177,-9.391 63.329,-9.391 ; 63.177,-9.366 63.329,-9.366 ; 63.177,-9.34 63.329,-9.34 ; 63.177,-9.315 63.329,-9.315 ; 63.177,-9.29 63.329,-9.29 ; 63.177,-9.264 63.329,-9.264 ; 63.177,-9.239 63.329,-9.239 ; 63.177,-9.213 63.329,-9.213 ; 63.177,-9.188 63.329,-9.188 ; 63.177,-9.163 63.329,-9.163 ; 63.177,-9.137 63.329,-9.137 ; 63.177,-9.112 63.329,-9.112 ; 63.177,-9.086 63.329,-9.086 ; 63.177,-9.061 63.329,-9.061 ; 63.177,-9.036 63.329,-9.036 ; 63.177,-9.01 63.329,-9.01 ; 63.177,-8.985 63.329,-8.985 ; 63.177,-8.959 63.329,-8.959 ; 63.177,-8.934 63.329,-8.934 ; 63.177,-8.909 63.329,-8.909 ; 63.177,-8.883 63.329,-8.883 ; 63.177,-8.858 63.329,-8.858 ; 63.177,-8.832 63.329,-8.832 ; 63.177,-8.807 63.329,-8.807 ; 63.177,-8.782 63.329,-8.782 ; 63.177,-8.756 63.329,-8.756 ; 63.177,-8.731 63.329,-8.731 ; 63.177,-8.705 63.329,-8.705 ; 63.177,-8.68 63.329,-8.68 ; 63.177,-8.655 63.329,-8.655 ; 63.177,-8.629 63.329,-8.629 ; 63.177,-8.604 63.329,-8.604 ; 63.177,-8.578 63.329,-8.578 ; 63.177,-8.553 63.329,-8.553 ; 63.177,-8.528 63.329,-8.528 ; 63.177,-8.502 63.329,-8.502 ; 63.177,-8.477 63.329,-8.477 ; 63.177,-8.451 63.329,-8.451 ; 63.177,-8.426 63.329,-8.426 ; 63.177,-8.401 63.329,-8.401 ; 63.177,-8.375 63.329,-8.375 ; 63.177,-8.35 63.329,-8.35 ; 63.177,-8.324 63.329,-8.324 ; 63.177,-8.299 63.329,-8.299 ; 63.177,-8.274 63.329,-8.274 ; 63.177,-8.248 63.329,-8.248 ; 63.177,-6.8 63.355,-6.8 ; 63.177,-6.775 63.329,-6.775 ; 63.177,-6.75 63.329,-6.75 ; 63.202,-7.994 63.278,-7.994 ; 63.202,-7.791 63.304,-7.791 ; 63.202,-6.877 63.38,-6.877 ; 63.202,-6.851 63.355,-6.851 ; 63.202,-6.826 63.355,-6.826 ; 63.202,-5.251 63.532,-5.251 ; 63.202,-5.226 63.558,-5.226 ; 63.202,-5.2 63.583,-5.2 ; 63.202,-5.175 63.609,-5.175 ; 63.202,-5.149 63.634,-5.149 ; 63.202,-5.124 63.278,-5.124 ; 63.228,-6.953 63.38,-6.953 ; 63.228,-6.927 63.38,-6.927 ; 63.228,-6.902 63.38,-6.902 ; 63.228,-4.083 63.888,-4.083 ; 63.228,-4.057 63.888,-4.057 ; 63.228,-4.032 63.888,-4.032 ; 63.228,-4.006 63.888,-4.006 ; 63.228,-3.981 63.888,-3.981 ; 63.228,-3.956 63.888,-3.956 ; 63.253,-7.029 63.405,-7.029 ; 63.253,-7.004 63.405,-7.004 ; 63.253,-6.978 63.405,-6.978 ; 63.278,-7.105 63.431,-7.105 ; 63.278,-7.08 63.431,-7.08 ; 63.278,-7.054 63.431,-7.054 ; 63.278,-5.276 63.431,-5.276 ; 63.304,-7.207 63.634,-7.207 ; 63.304,-7.181 63.456,-7.181 ; 63.304,-7.156 63.456,-7.156 ; 63.304,-7.131 63.456,-7.131 ; 63.329,-7.283 63.634,-7.283 ; 63.329,-7.258 63.634,-7.258 ; 63.329,-7.232 63.634,-7.232 ; 63.355,-7.359 63.609,-7.359 ; 63.355,-7.334 63.609,-7.334 ; 63.355,-7.308 63.609,-7.308 ; 63.38,-7.435 63.583,-7.435 ; 63.38,-7.41 63.583,-7.41 ; 63.38,-7.385 63.583,-7.385 ; 63.38,-5.124 63.634,-5.124 ; 63.405,-7.486 63.558,-7.486 ; 63.405,-7.461 63.583,-7.461 ; 63.431,-5.099 63.634,-5.099 ; 63.456,-5.073 63.659,-5.073 ; 63.482,-7.181 63.659,-7.181 ; 63.482,-5.048 63.659,-5.048 ; 63.482,-5.022 63.659,-5.022 ; 63.482,-4.997 63.659,-4.997 ; 63.482,-4.972 63.659,-4.972 ; 63.482,-4.946 63.659,-4.946 ; 63.482,-4.921 63.659,-4.921 ; 63.482,-4.895 63.659,-4.895 ; 63.482,-4.87 63.659,-4.87 ; 63.482,-4.845 63.659,-4.845 ; 63.482,-4.819 63.659,-4.819 ; 63.482,-4.794 63.659,-4.794 ; 63.482,-4.768 63.659,-4.768 ; 63.482,-4.743 63.659,-4.743 ; 63.482,-4.718 63.659,-4.718 ; 63.482,-4.692 63.659,-4.692 ; 63.482,-4.667 63.659,-4.667 ; 63.482,-4.641 63.659,-4.641 ; 63.482,-4.616 63.659,-4.616 ; 63.482,-4.591 63.659,-4.591 ; 63.482,-4.565 63.659,-4.565 ; 63.482,-4.54 63.659,-4.54 ; 63.482,-4.514 63.659,-4.514 ; 63.482,-4.489 63.659,-4.489 ; 63.482,-4.464 63.659,-4.464 ; 63.482,-4.438 63.659,-4.438 ; 63.482,-4.413 63.659,-4.413 ; 63.482,-4.387 63.659,-4.387 ; 63.482,-4.362 63.659,-4.362 ; 63.482,-4.337 63.659,-4.337 ; 63.482,-4.311 63.659,-4.311 ; 63.482,-4.286 63.659,-4.286 ; 63.482,-4.26 63.659,-4.26 ; 63.482,-4.235 63.659,-4.235 ; 63.482,-4.21 63.659,-4.21 ; 63.482,-4.184 63.659,-4.184 ; 63.482,-4.159 63.659,-4.159 ; 63.482,-4.133 63.659,-4.133 ; 63.482,-4.108 63.659,-4.108 ; 63.482,-3.93 63.659,-3.93 ; 63.482,-3.905 63.659,-3.905 ; 63.482,-3.879 63.659,-3.879 ; 63.482,-3.854 63.659,-3.854 ; 63.482,-3.829 63.659,-3.829 ; 63.482,-3.803 63.659,-3.803 ; 63.482,-3.778 63.659,-3.778 ; 63.482,-3.752 63.659,-3.752 ; 63.482,-3.727 63.659,-3.727 ; 63.482,-3.702 63.659,-3.702 ; 63.482,-3.676 63.659,-3.676 ; 63.482,-3.651 63.659,-3.651 ; 63.482,-3.625 63.659,-3.625 ; 63.507,-7.156 63.659,-7.156 ; 63.507,-7.131 63.659,-7.131 ; 63.507,-7.105 63.685,-7.105 ; 63.507,-7.08 63.685,-7.08 ; 63.532,-7.054 63.685,-7.054 ; 63.532,-7.029 63.685,-7.029 ; 63.532,-7.004 63.71,-7.004 ; 63.558,-6.978 63.71,-6.978 ; 63.558,-6.953 63.71,-6.953 ; 63.558,-6.927 63.736,-6.927 ; 63.558,-6.902 63.736,-6.902 ; 63.583,-9.544 63.913,-9.544 ; 63.583,-9.518 63.964,-9.518 ; 63.583,-6.877 63.736,-6.877 ; 63.583,-6.851 63.761,-6.851 ; 63.583,-6.826 63.761,-6.826 ; 63.583,-6.8 63.761,-6.8 ; 63.609,-9.493 63.99,-9.493 ; 63.609,-9.467 63.99,-9.467 ; 63.609,-9.442 64.015,-9.442 ; 63.609,-9.417 63.634,-9.417 ; 63.609,-8.375 64.294,-8.375 ; 63.609,-8.35 64.294,-8.35 ; 63.609,-8.324 64.294,-8.324 ; 63.609,-8.299 64.294,-8.299 ; 63.609,-8.274 64.294,-8.274 ; 63.609,-8.248 64.294,-8.248 ; 63.609,-6.775 63.761,-6.775 ; 63.609,-6.75 63.786,-6.75 ; 63.609,-6.724 63.786,-6.724 ; 63.634,-6.699 63.786,-6.699 ; 63.634,-6.673 63.812,-6.673 ; 63.634,-6.648 63.812,-6.648 ; 63.634,-6.623 63.812,-6.623 ; 63.659,-9.569 63.837,-9.569 ; 63.659,-6.597 63.812,-6.597 ; 63.659,-6.572 63.837,-6.572 ; 63.659,-6.546 63.837,-6.546 ; 63.659,-6.521 63.837,-6.521 ; 63.685,-6.496 63.863,-6.496 ; 63.685,-6.47 63.863,-6.47 ; 63.685,-6.445 63.863,-6.445 ; 63.71,-6.419 63.863,-6.419 ; 63.71,-6.394 63.888,-6.394 ; 63.71,-6.369 63.888,-6.369 ; 63.71,-6.343 63.888,-6.343 ; 63.736,-6.318 63.913,-6.318 ; 63.736,-6.292 63.913,-6.292 ; 63.736,-6.267 63.913,-6.267 ; 63.736,-6.242 63.913,-6.242 ; 63.761,-6.216 63.939,-6.216 ; 63.786,-9.417 64.015,-9.417 ; 63.837,-9.391 64.04,-9.391 ; 63.863,-9.366 64.04,-9.366 ; 63.863,-9.34 64.04,-9.34 ; 63.863,-9.315 64.04,-9.315 ; 63.888,-9.29 64.04,-9.29 ; 63.888,-9.264 64.04,-9.264 ; 63.888,-9.239 64.04,-9.239 ; 63.888,-9.213 64.04,-9.213 ; 63.888,-9.188 64.04,-9.188 ; 63.888,-9.163 64.04,-9.163 ; 63.888,-9.137 64.04,-9.137 ; 63.888,-9.112 64.04,-9.112 ; 63.888,-9.086 64.04,-9.086 ; 63.888,-9.061 64.04,-9.061 ; 63.888,-9.036 64.04,-9.036 ; 63.888,-9.01 64.04,-9.01 ; 63.888,-8.985 64.04,-8.985 ; 63.888,-8.959 64.04,-8.959 ; 63.888,-8.934 64.04,-8.934 ; 63.888,-8.909 64.04,-8.909 ; 63.888,-8.883 64.04,-8.883 ; 63.888,-8.858 64.04,-8.858 ; 63.888,-8.832 64.04,-8.832 ; 63.888,-8.807 64.04,-8.807 ; 63.888,-8.782 64.04,-8.782 ; 63.888,-8.756 64.04,-8.756 ; 63.888,-8.731 64.04,-8.731 ; 63.888,-8.705 64.04,-8.705 ; 63.888,-8.68 64.04,-8.68 ; 63.888,-8.655 64.04,-8.655 ; 63.888,-8.629 64.04,-8.629 ; 63.888,-8.604 64.04,-8.604 ; 63.888,-8.578 64.04,-8.578 ; 63.888,-8.553 64.04,-8.553 ; 63.888,-8.528 64.04,-8.528 ; 63.888,-8.502 64.04,-8.502 ; 63.888,-8.477 64.04,-8.477 ; 63.888,-8.451 64.04,-8.451 ; 63.888,-8.426 64.04,-8.426 ; 63.888,-8.401 64.04,-8.401 ; 63.888,-8.223 64.04,-8.223 ; 63.888,-8.197 64.04,-8.197 ; 63.888,-8.172 64.04,-8.172 ; 63.888,-8.147 64.04,-8.147 ; 63.888,-8.121 64.04,-8.121 ; 63.888,-8.096 64.04,-8.096 ; 63.888,-8.07 64.04,-8.07 ; 63.888,-8.045 64.04,-8.045 ; 63.888,-8.02 64.04,-8.02 ; 63.888,-7.994 64.04,-7.994 ; 63.888,-7.969 64.04,-7.969 ; 63.888,-7.943 64.04,-7.943 ; 64.015,-4.819 64.193,-4.819 ; 64.015,-4.794 64.193,-4.794 ; 64.015,-4.768 64.193,-4.768 ; 64.015,-4.743 64.193,-4.743 ; 64.015,-4.718 64.167,-4.718 ; 64.015,-4.692 64.167,-4.692 ; 64.015,-4.667 64.167,-4.667 ; 64.015,-4.641 64.167,-4.641 ; 64.015,-4.616 64.167,-4.616 ; 64.015,-4.591 64.167,-4.591 ; 64.015,-4.565 64.167,-4.565 ; 64.015,-4.54 64.167,-4.54 ; 64.015,-4.514 64.167,-4.514 ; 64.015,-4.489 64.167,-4.489 ; 64.015,-4.464 64.193,-4.464 ; 64.015,-4.438 64.193,-4.438 ; 64.015,-4.413 64.193,-4.413 ; 64.015,-4.387 64.193,-4.387 ; 64.04,-4.895 64.218,-4.895 ; 64.04,-4.87 64.218,-4.87 ; 64.04,-4.845 64.218,-4.845 ; 64.04,-4.362 64.218,-4.362 ; 64.04,-4.337 64.218,-4.337 ; 64.04,-4.311 64.244,-4.311 ; 64.066,-4.972 64.269,-4.972 ; 64.066,-4.946 64.269,-4.946 ; 64.066,-4.921 64.244,-4.921 ; 64.066,-4.286 64.244,-4.286 ; 64.066,-4.26 64.269,-4.26 ; 64.066,-4.235 64.269,-4.235 ; 64.091,-5.022 64.32,-5.022 ; 64.091,-4.997 64.294,-4.997 ; 64.091,-4.21 64.294,-4.21 ; 64.117,-5.048 64.345,-5.048 ; 64.117,-4.184 64.32,-4.184 ; 64.117,-4.159 64.345,-4.159 ; 64.142,-5.073 64.371,-5.073 ; 64.142,-4.133 64.396,-4.133 ; 64.167,-7.486 64.32,-7.486 ; 64.167,-7.461 64.32,-7.461 ; 64.167,-7.435 64.32,-7.435 ; 64.167,-7.41 64.32,-7.41 ; 64.167,-7.385 64.32,-7.385 ; 64.167,-7.359 64.548,-7.359 ; 64.167,-7.334 64.498,-7.334 ; 64.167,-7.308 64.447,-7.308 ; 64.167,-7.283 64.421,-7.283 ; 64.167,-7.258 64.396,-7.258 ; 64.167,-7.232 64.371,-7.232 ; 64.167,-7.207 64.371,-7.207 ; 64.167,-7.181 64.345,-7.181 ; 64.167,-7.156 64.345,-7.156 ; 64.167,-7.131 64.32,-7.131 ; 64.167,-7.105 64.32,-7.105 ; 64.167,-7.08 64.32,-7.08 ; 64.167,-7.054 64.32,-7.054 ; 64.167,-7.029 64.32,-7.029 ; 64.167,-7.004 64.32,-7.004 ; 64.167,-6.978 64.32,-6.978 ; 64.167,-6.953 64.32,-6.953 ; 64.167,-6.927 64.32,-6.927 ; 64.167,-6.902 64.32,-6.902 ; 64.167,-6.877 64.32,-6.877 ; 64.167,-6.851 64.32,-6.851 ; 64.167,-6.826 64.32,-6.826 ; 64.167,-6.8 64.32,-6.8 ; 64.167,-6.775 64.32,-6.775 ; 64.167,-6.75 64.32,-6.75 ; 64.167,-6.724 64.32,-6.724 ; 64.167,-6.699 64.32,-6.699 ; 64.167,-6.673 64.32,-6.673 ; 64.167,-6.648 64.32,-6.648 ; 64.167,-6.623 64.32,-6.623 ; 64.167,-6.597 64.32,-6.597 ; 64.167,-6.572 64.345,-6.572 ; 64.167,-6.546 64.345,-6.546 ; 64.167,-6.521 64.371,-6.521 ; 64.167,-6.496 64.371,-6.496 ; 64.167,-6.47 64.396,-6.47 ; 64.167,-6.445 64.421,-6.445 ; 64.167,-6.419 64.447,-6.419 ; 64.167,-6.394 64.472,-6.394 ; 64.167,-6.369 64.523,-6.369 ; 64.167,-6.343 64.32,-6.343 ; 64.167,-6.318 64.32,-6.318 ; 64.167,-6.292 64.32,-6.292 ; 64.167,-6.267 64.32,-6.267 ; 64.167,-6.242 64.32,-6.242 ; 64.167,-6.216 64.32,-6.216 ; 64.167,-6.191 64.32,-6.191 ; 64.167,-6.165 64.32,-6.165 ; 64.167,-6.14 64.32,-6.14 ; 64.167,-6.115 64.32,-6.115 ; 64.167,-6.089 64.32,-6.089 ; 64.167,-6.064 64.32,-6.064 ; 64.167,-6.038 64.32,-6.038 ; 64.167,-6.013 64.32,-6.013 ; 64.167,-5.988 64.32,-5.988 ; 64.167,-5.962 64.32,-5.962 ; 64.167,-5.937 64.32,-5.937 ; 64.167,-5.911 64.32,-5.911 ; 64.167,-5.886 64.32,-5.886 ; 64.167,-5.861 64.32,-5.861 ; 64.167,-5.835 64.32,-5.835 ; 64.167,-5.81 64.32,-5.81 ; 64.167,-5.784 64.32,-5.784 ; 64.167,-5.759 64.32,-5.759 ; 64.167,-5.734 64.32,-5.734 ; 64.167,-5.708 64.32,-5.708 ; 64.167,-5.683 64.32,-5.683 ; 64.167,-5.099 64.421,-5.099 ; 64.167,-4.108 64.447,-4.108 ; 64.193,-5.124 64.498,-5.124 ; 64.193,-4.083 64.523,-4.083 ; 64.218,-5.149 64.955,-5.149 ; 64.218,-4.057 64.955,-4.057 ; 64.244,-5.175 64.929,-5.175 ; 64.244,-4.032 64.929,-4.032 ; 64.269,-5.2 64.904,-5.2 ; 64.294,-4.006 64.879,-4.006 ; 64.32,-5.226 64.853,-5.226 ; 64.32,-3.981 64.853,-3.981 ; 64.345,-7.385 65.056,-7.385 ; 64.345,-6.343 64.574,-6.343 ; 64.371,-7.41 65.031,-7.41 ; 64.371,-6.318 65.056,-6.318 ; 64.396,-7.435 65.006,-7.435 ; 64.396,-6.292 65.031,-6.292 ; 64.396,-5.251 64.777,-5.251 ; 64.396,-3.956 64.777,-3.956 ; 64.421,-7.461 64.98,-7.461 ; 64.421,-6.267 65.006,-6.267 ; 64.447,-6.242 64.955,-6.242 ; 64.472,-9.544 64.625,-9.544 ; 64.472,-9.518 64.625,-9.518 ; 64.472,-9.493 64.625,-9.493 ; 64.472,-9.467 64.625,-9.467 ; 64.472,-9.442 64.625,-9.442 ; 64.472,-9.417 64.904,-9.417 ; 64.472,-9.391 64.828,-9.391 ; 64.472,-9.366 64.777,-9.366 ; 64.472,-9.34 64.752,-9.34 ; 64.472,-9.315 64.726,-9.315 ; 64.472,-9.29 64.701,-9.29 ; 64.472,-9.264 64.675,-9.264 ; 64.472,-9.239 64.675,-9.239 ; 64.472,-9.213 64.65,-9.213 ; 64.472,-9.188 64.65,-9.188 ; 64.472,-9.163 64.625,-9.163 ; 64.472,-9.137 64.625,-9.137 ; 64.472,-9.112 64.625,-9.112 ; 64.472,-9.086 64.625,-9.086 ; 64.472,-9.061 64.625,-9.061 ; 64.472,-9.036 64.625,-9.036 ; 64.472,-9.01 64.625,-9.01 ; 64.472,-8.985 64.625,-8.985 ; 64.472,-8.959 64.625,-8.959 ; 64.472,-8.934 64.625,-8.934 ; 64.472,-8.909 64.625,-8.909 ; 64.472,-8.883 64.625,-8.883 ; 64.472,-8.858 64.625,-8.858 ; 64.472,-8.832 64.625,-8.832 ; 64.472,-8.807 64.625,-8.807 ; 64.472,-8.782 64.625,-8.782 ; 64.472,-8.756 64.625,-8.756 ; 64.472,-8.731 64.625,-8.731 ; 64.472,-8.705 64.625,-8.705 ; 64.472,-8.68 64.625,-8.68 ; 64.472,-8.655 64.625,-8.655 ; 64.472,-8.629 64.625,-8.629 ; 64.472,-8.604 64.625,-8.604 ; 64.472,-8.578 64.625,-8.578 ; 64.472,-8.553 64.625,-8.553 ; 64.472,-8.528 64.625,-8.528 ; 64.472,-8.502 64.625,-8.502 ; 64.472,-8.477 64.625,-8.477 ; 64.472,-8.451 64.625,-8.451 ; 64.472,-8.426 64.625,-8.426 ; 64.472,-8.401 64.625,-8.401 ; 64.472,-8.375 64.625,-8.375 ; 64.472,-8.35 64.625,-8.35 ; 64.472,-8.324 64.625,-8.324 ; 64.472,-8.299 64.625,-8.299 ; 64.472,-8.274 64.625,-8.274 ; 64.472,-8.248 64.625,-8.248 ; 64.472,-7.486 64.929,-7.486 ; 64.498,-6.216 64.904,-6.216 ; 64.498,-5.276 64.675,-5.276 ; 64.523,-3.93 64.65,-3.93 ; 64.548,-7.512 64.879,-7.512 ; 64.599,-6.191 64.828,-6.191 ; 64.65,-9.442 65.361,-9.442 ; 64.65,-4.083 64.98,-4.083 ; 64.675,-9.467 65.336,-9.467 ; 64.675,-5.124 64.98,-5.124 ; 64.701,-9.493 65.31,-9.493 ; 64.752,-9.518 65.285,-9.518 ; 64.752,-5.099 65.006,-5.099 ; 64.752,-4.108 65.006,-4.108 ; 64.777,-6.343 65.082,-6.343 ; 64.777,-4.133 65.031,-4.133 ; 64.802,-9.544 65.234,-9.544 ; 64.802,-7.359 65.082,-7.359 ; 64.802,-5.073 65.031,-5.073 ; 64.828,-5.048 65.056,-5.048 ; 64.828,-4.159 65.056,-4.159 ; 64.853,-7.334 65.107,-7.334 ; 64.853,-6.369 65.107,-6.369 ; 64.853,-5.022 65.082,-5.022 ; 64.853,-4.184 65.056,-4.184 ; 64.879,-6.394 65.107,-6.394 ; 64.879,-4.997 65.082,-4.997 ; 64.879,-4.21 65.082,-4.21 ; 64.904,-7.308 65.107,-7.308 ; 64.904,-6.419 65.133,-6.419 ; 64.904,-4.972 65.107,-4.972 ; 64.904,-4.946 65.107,-4.946 ; 64.904,-4.26 65.107,-4.26 ; 64.904,-4.235 65.107,-4.235 ; 64.929,-9.569 65.133,-9.569 ; 64.929,-7.283 65.133,-7.283 ; 64.929,-6.445 65.133,-6.445 ; 64.929,-4.921 65.133,-4.921 ; 64.929,-4.311 65.133,-4.311 ; 64.929,-4.286 65.107,-4.286 ; 64.955,-7.258 65.133,-7.258 ; 64.955,-7.232 65.158,-7.232 ; 64.955,-6.47 65.158,-6.47 ; 64.955,-4.895 65.133,-4.895 ; 64.955,-4.87 65.133,-4.87 ; 64.955,-4.845 65.158,-4.845 ; 64.955,-4.362 65.133,-4.362 ; 64.955,-4.337 65.133,-4.337 ; 64.98,-7.207 65.158,-7.207 ; 64.98,-7.181 65.183,-7.181 ; 64.98,-6.521 65.183,-6.521 ; 64.98,-6.496 65.158,-6.496 ; 64.98,-4.819 65.158,-4.819 ; 64.98,-4.794 65.158,-4.794 ; 64.98,-4.768 65.158,-4.768 ; 64.98,-4.464 65.158,-4.464 ; 64.98,-4.438 65.158,-4.438 ; 64.98,-4.413 65.158,-4.413 ; 64.98,-4.387 65.158,-4.387 ; 65.006,-7.156 65.183,-7.156 ; 65.006,-7.131 65.183,-7.131 ; 65.006,-6.597 65.209,-6.597 ; 65.006,-6.572 65.183,-6.572 ; 65.006,-6.546 65.183,-6.546 ; 65.006,-4.743 65.158,-4.743 ; 65.006,-4.718 65.158,-4.718 ; 65.006,-4.692 65.158,-4.692 ; 65.006,-4.667 65.158,-4.667 ; 65.006,-4.641 65.183,-4.641 ; 65.006,-4.616 65.183,-4.616 ; 65.006,-4.591 65.183,-4.591 ; 65.006,-4.565 65.183,-4.565 ; 65.006,-4.54 65.158,-4.54 ; 65.006,-4.514 65.158,-4.514 ; 65.006,-4.489 65.158,-4.489 ; 65.031,-7.105 65.209,-7.105 ; 65.031,-7.08 65.209,-7.08 ; 65.031,-7.054 65.209,-7.054 ; 65.031,-7.029 65.209,-7.029 ; 65.031,-7.004 65.209,-7.004 ; 65.031,-6.724 65.209,-6.724 ; 65.031,-6.699 65.209,-6.699 ; 65.031,-6.673 65.209,-6.673 ; 65.031,-6.648 65.209,-6.648 ; 65.031,-6.623 65.209,-6.623 ; 65.056,-6.978 65.209,-6.978 ; 65.056,-6.953 65.209,-6.953 ; 65.056,-6.927 65.209,-6.927 ; 65.056,-6.902 65.209,-6.902 ; 65.056,-6.877 65.209,-6.877 ; 65.056,-6.851 65.209,-6.851 ; 65.056,-6.826 65.209,-6.826 ; 65.056,-6.8 65.209,-6.8 ; 65.056,-6.775 65.209,-6.775 ; 65.056,-6.75 65.209,-6.75 ; 65.082,-9.417 65.387,-9.417 ; 65.158,-9.391 65.387,-9.391 ; 65.183,-9.366 65.412,-9.366 ; 65.209,-9.34 65.412,-9.34 ; 65.234,-9.315 65.437,-9.315 ; 65.26,-9.29 65.437,-9.29 ; 65.26,-9.264 65.437,-9.264 ; 65.26,-9.239 65.463,-9.239 ; 65.285,-9.213 65.463,-9.213 ; 65.285,-9.188 65.463,-9.188 ; 65.285,-9.163 65.463,-9.163 ; 65.285,-9.137 65.463,-9.137 ; 65.285,-9.112 65.463,-9.112 ; 65.285,-9.086 65.463,-9.086 ; 65.285,-9.061 65.463,-9.061 ; 65.285,-9.036 65.463,-9.036 ; 65.285,-9.01 65.463,-9.01 ; 65.285,-8.985 65.463,-8.985 ; 65.285,-8.959 65.463,-8.959 ; 65.285,-8.934 65.463,-8.934 ; 65.285,-8.909 65.463,-8.909 ; 65.285,-8.883 65.463,-8.883 ; 65.285,-8.858 65.463,-8.858 ; 65.285,-8.832 65.463,-8.832 ; 65.285,-8.807 65.463,-8.807 ; 65.285,-8.782 65.463,-8.782 ; 65.285,-8.756 65.463,-8.756 ; 65.285,-8.731 65.463,-8.731 ; 65.285,-8.705 65.463,-8.705 ; 65.285,-8.68 65.463,-8.68 ; 65.285,-8.655 65.463,-8.655 ; 65.285,-8.629 65.463,-8.629 ; 65.285,-8.604 65.463,-8.604 ; 65.285,-8.578 65.463,-8.578 ; 65.285,-8.553 65.463,-8.553 ; 65.285,-8.528 65.463,-8.528 ; 65.285,-8.502 65.463,-8.502 ; 65.285,-8.477 65.463,-8.477 ; 65.285,-8.451 65.463,-8.451 ; 65.285,-8.426 65.463,-8.426 ; 65.285,-8.401 65.463,-8.401 ; 65.285,-8.375 65.463,-8.375 ; 65.285,-8.35 65.463,-8.35 ; 65.285,-8.324 65.463,-8.324 ; 65.285,-8.299 65.463,-8.299 ; 65.285,-8.274 65.463,-8.274 ; 65.285,-8.248 65.463,-8.248 ; 65.336,-6.343 65.412,-6.343 ; 65.336,-6.318 65.768,-6.318 ; 65.336,-6.292 65.742,-6.292 ; 65.336,-6.267 65.717,-6.267 ; 65.336,-6.242 65.666,-6.242 ; 65.336,-6.216 65.641,-6.216 ; 65.336,-6.191 65.564,-6.191 ; 65.387,-4.819 65.564,-4.819 ; 65.387,-4.794 65.564,-4.794 ; 65.387,-4.768 65.564,-4.768 ; 65.387,-4.743 65.564,-4.743 ; 65.387,-4.718 65.564,-4.718 ; 65.387,-4.692 65.539,-4.692 ; 65.387,-4.667 65.539,-4.667 ; 65.387,-4.641 65.539,-4.641 ; 65.387,-4.616 65.539,-4.616 ; 65.387,-4.591 65.539,-4.591 ; 65.387,-4.565 65.539,-4.565 ; 65.387,-4.54 65.539,-4.54 ; 65.387,-4.514 65.539,-4.514 ; 65.387,-4.489 65.564,-4.489 ; 65.387,-4.464 65.564,-4.464 ; 65.387,-4.438 65.564,-4.438 ; 65.387,-4.413 65.564,-4.413 ; 65.387,-4.387 65.564,-4.387 ; 65.412,-4.921 65.615,-4.921 ; 65.412,-4.895 65.59,-4.895 ; 65.412,-4.87 65.59,-4.87 ; 65.412,-4.845 65.59,-4.845 ; 65.412,-4.362 65.564,-4.362 ; 65.412,-4.337 65.59,-4.337 ; 65.412,-4.311 65.59,-4.311 ; 65.412,-4.286 65.615,-4.286 ; 65.437,-4.997 65.641,-4.997 ; 65.437,-4.972 65.641,-4.972 ; 65.437,-4.946 65.615,-4.946 ; 65.437,-4.26 65.615,-4.26 ; 65.437,-4.235 65.641,-4.235 ; 65.437,-4.21 65.641,-4.21 ; 65.463,-5.048 65.691,-5.048 ; 65.463,-5.022 65.666,-5.022 ; 65.463,-4.184 65.666,-4.184 ; 65.463,-4.159 65.691,-4.159 ; 65.488,-6.343 65.768,-6.343 ; 65.488,-5.073 65.717,-5.073 ; 65.488,-4.133 65.717,-4.133 ; 65.514,-5.099 65.768,-5.099 ; 65.514,-4.108 65.768,-4.108 ; 65.539,-5.149 66.25,-5.149 ; 65.539,-5.124 65.844,-5.124 ; 65.539,-4.083 65.844,-4.083 ; 65.539,-4.057 66.225,-4.057 ; 65.564,-5.175 66.225,-5.175 ; 65.564,-4.032 66.199,-4.032 ; 65.59,-6.369 65.945,-6.369 ; 65.615,-5.2 66.174,-5.2 ; 65.615,-4.006 66.174,-4.006 ; 65.641,-6.394 65.945,-6.394 ; 65.641,-5.226 66.149,-5.226 ; 65.641,-3.981 66.123,-3.981 ; 65.666,-6.419 65.945,-6.419 ; 65.691,-6.445 65.945,-6.445 ; 65.691,-5.251 66.072,-5.251 ; 65.717,-6.47 65.945,-6.47 ; 65.717,-3.956 66.072,-3.956 ; 65.742,-6.521 65.945,-6.521 ; 65.742,-6.496 65.945,-6.496 ; 65.768,-6.597 65.945,-6.597 ; 65.768,-6.572 65.945,-6.572 ; 65.768,-6.546 65.945,-6.546 ; 65.793,-7.486 65.945,-7.486 ; 65.793,-7.461 65.945,-7.461 ; 65.793,-7.435 65.945,-7.435 ; 65.793,-7.41 65.945,-7.41 ; 65.793,-7.385 65.945,-7.385 ; 65.793,-7.359 65.945,-7.359 ; 65.793,-7.334 65.945,-7.334 ; 65.793,-7.308 65.945,-7.308 ; 65.793,-7.283 65.945,-7.283 ; 65.793,-7.258 65.945,-7.258 ; 65.793,-7.232 65.945,-7.232 ; 65.793,-7.207 65.945,-7.207 ; 65.793,-7.181 65.945,-7.181 ; 65.793,-7.156 65.945,-7.156 ; 65.793,-7.131 65.945,-7.131 ; 65.793,-7.105 65.945,-7.105 ; 65.793,-7.08 65.945,-7.08 ; 65.793,-7.054 65.945,-7.054 ; 65.793,-7.029 65.945,-7.029 ; 65.793,-7.004 65.945,-7.004 ; 65.793,-6.978 65.945,-6.978 ; 65.793,-6.953 65.945,-6.953 ; 65.793,-6.927 65.945,-6.927 ; 65.793,-6.902 65.945,-6.902 ; 65.793,-6.877 65.945,-6.877 ; 65.793,-6.851 65.945,-6.851 ; 65.793,-6.826 65.945,-6.826 ; 65.793,-6.8 65.945,-6.8 ; 65.793,-6.775 65.945,-6.775 ; 65.793,-6.75 65.945,-6.75 ; 65.793,-6.724 65.945,-6.724 ; 65.793,-6.699 65.945,-6.699 ; 65.793,-6.673 65.945,-6.673 ; 65.793,-6.648 65.945,-6.648 ; 65.793,-6.623 65.945,-6.623 ; 65.793,-6.343 65.945,-6.343 ; 65.793,-6.318 65.945,-6.318 ; 65.793,-6.292 65.945,-6.292 ; 65.793,-6.267 65.945,-6.267 ; 65.793,-6.242 65.945,-6.242 ; 65.793,-6.216 65.945,-6.216 ; 65.818,-9.544 65.971,-9.544 ; 65.818,-9.518 65.971,-9.518 ; 65.818,-9.493 65.971,-9.493 ; 65.818,-9.467 65.971,-9.467 ; 65.818,-9.442 65.971,-9.442 ; 65.818,-9.417 65.971,-9.417 ; 65.818,-9.391 65.971,-9.391 ; 65.818,-9.366 65.971,-9.366 ; 65.818,-9.34 65.971,-9.34 ; 65.818,-9.315 65.971,-9.315 ; 65.818,-9.29 65.971,-9.29 ; 65.818,-9.264 65.971,-9.264 ; 65.818,-9.239 65.971,-9.239 ; 65.818,-9.213 65.971,-9.213 ; 65.818,-9.188 65.971,-9.188 ; 65.818,-9.163 65.971,-9.163 ; 65.818,-9.137 65.971,-9.137 ; 65.818,-9.112 65.971,-9.112 ; 65.818,-9.086 65.971,-9.086 ; 65.818,-9.061 65.971,-9.061 ; 65.818,-9.036 65.971,-9.036 ; 65.818,-9.01 65.971,-9.01 ; 65.818,-8.985 65.971,-8.985 ; 65.818,-8.959 65.971,-8.959 ; 65.818,-8.934 65.971,-8.934 ; 65.818,-8.909 65.971,-8.909 ; 65.818,-8.883 65.971,-8.883 ; 65.818,-8.858 65.971,-8.858 ; 65.818,-8.832 65.971,-8.832 ; 65.818,-8.807 65.971,-8.807 ; 65.818,-8.782 65.971,-8.782 ; 65.818,-8.756 65.971,-8.756 ; 65.818,-8.731 65.971,-8.731 ; 65.818,-8.705 65.971,-8.705 ; 65.818,-8.68 65.971,-8.68 ; 65.818,-8.655 65.971,-8.655 ; 65.818,-8.629 65.971,-8.629 ; 65.818,-8.604 65.971,-8.604 ; 65.818,-8.578 65.971,-8.578 ; 65.818,-8.553 65.971,-8.553 ; 65.818,-8.528 65.971,-8.528 ; 65.818,-8.502 65.971,-8.502 ; 65.818,-8.477 65.971,-8.477 ; 65.818,-8.451 65.971,-8.451 ; 65.818,-8.426 65.971,-8.426 ; 65.818,-8.401 65.971,-8.401 ; 65.818,-8.375 65.971,-8.375 ; 65.818,-8.35 65.971,-8.35 ; 65.818,-8.324 65.971,-8.324 ; 65.818,-8.299 65.971,-8.299 ; 65.818,-8.274 65.971,-8.274 ; 65.818,-8.248 65.971,-8.248 ; 65.818,-8.223 65.971,-8.223 ; 65.818,-8.197 65.971,-8.197 ; 65.818,-8.172 65.971,-8.172 ; 65.818,-8.147 65.971,-8.147 ; 65.818,-8.121 65.971,-8.121 ; 65.818,-8.096 65.971,-8.096 ; 65.818,-8.07 65.971,-8.07 ; 65.818,-8.045 65.971,-8.045 ; 65.818,-8.02 65.971,-8.02 ; 65.818,-7.994 65.971,-7.994 ; 65.818,-7.969 65.971,-7.969 ; 65.818,-7.943 65.971,-7.943 ; 65.818,-7.918 65.971,-7.918 ; 65.818,-7.893 65.971,-7.893 ; 65.818,-7.867 65.971,-7.867 ; 65.818,-7.842 65.971,-7.842 ; 65.818,-7.816 65.971,-7.816 ; 65.818,-7.791 65.971,-7.791 ; 65.818,-7.766 65.971,-7.766 ; 65.818,-7.74 65.971,-7.74 ; 65.818,-7.715 65.971,-7.715 ; 65.818,-5.276 65.971,-5.276 ; 65.818,-3.93 65.945,-3.93 ; 65.971,-4.083 66.25,-4.083 ; 65.996,-5.124 66.428,-5.124 ; 66.072,-5.099 66.428,-5.099 ; 66.072,-4.108 66.428,-4.108 ; 66.123,-5.073 66.428,-5.073 ; 66.123,-4.133 66.428,-4.133 ; 66.149,-5.048 66.428,-5.048 ; 66.149,-4.159 66.428,-4.159 ; 66.174,-5.022 66.428,-5.022 ; 66.174,-4.184 66.428,-4.184 ; 66.199,-4.997 66.428,-4.997 ; 66.199,-4.21 66.428,-4.21 ; 66.225,-4.972 66.428,-4.972 ; 66.225,-4.26 66.428,-4.26 ; 66.225,-4.235 66.428,-4.235 ; 66.25,-4.946 66.428,-4.946 ; 66.25,-4.921 66.428,-4.921 ; 66.25,-4.311 66.428,-4.311 ; 66.25,-4.286 66.428,-4.286 ; 66.276,-9.112 66.453,-9.112 ; 66.276,-9.086 66.453,-9.086 ; 66.276,-9.061 66.453,-9.061 ; 66.276,-9.036 66.453,-9.036 ; 66.276,-9.01 66.428,-9.01 ; 66.276,-8.985 66.428,-8.985 ; 66.276,-8.959 66.428,-8.959 ; 66.276,-8.934 66.428,-8.934 ; 66.276,-8.909 66.428,-8.909 ; 66.276,-8.883 66.428,-8.883 ; 66.276,-8.858 66.428,-8.858 ; 66.276,-8.832 66.428,-8.832 ; 66.276,-8.807 66.428,-8.807 ; 66.276,-8.782 66.428,-8.782 ; 66.276,-8.756 66.453,-8.756 ; 66.276,-8.731 66.453,-8.731